# Altium PCB TIDA-010954-RevB.PcbDoc (part 4 of 8)
Units mm, origin at the board's own origin, x right, y up, seen from the top; angles counter-clockwise.
Board outline 290 x 100 mm, 6 copper layers (Top Layer, Mid1, Mid2, Mid3, Mid4, Bottom Layer), stack 1.59 mm thick; 394 components, 204 nets, 1137 pads, 2188 vias.
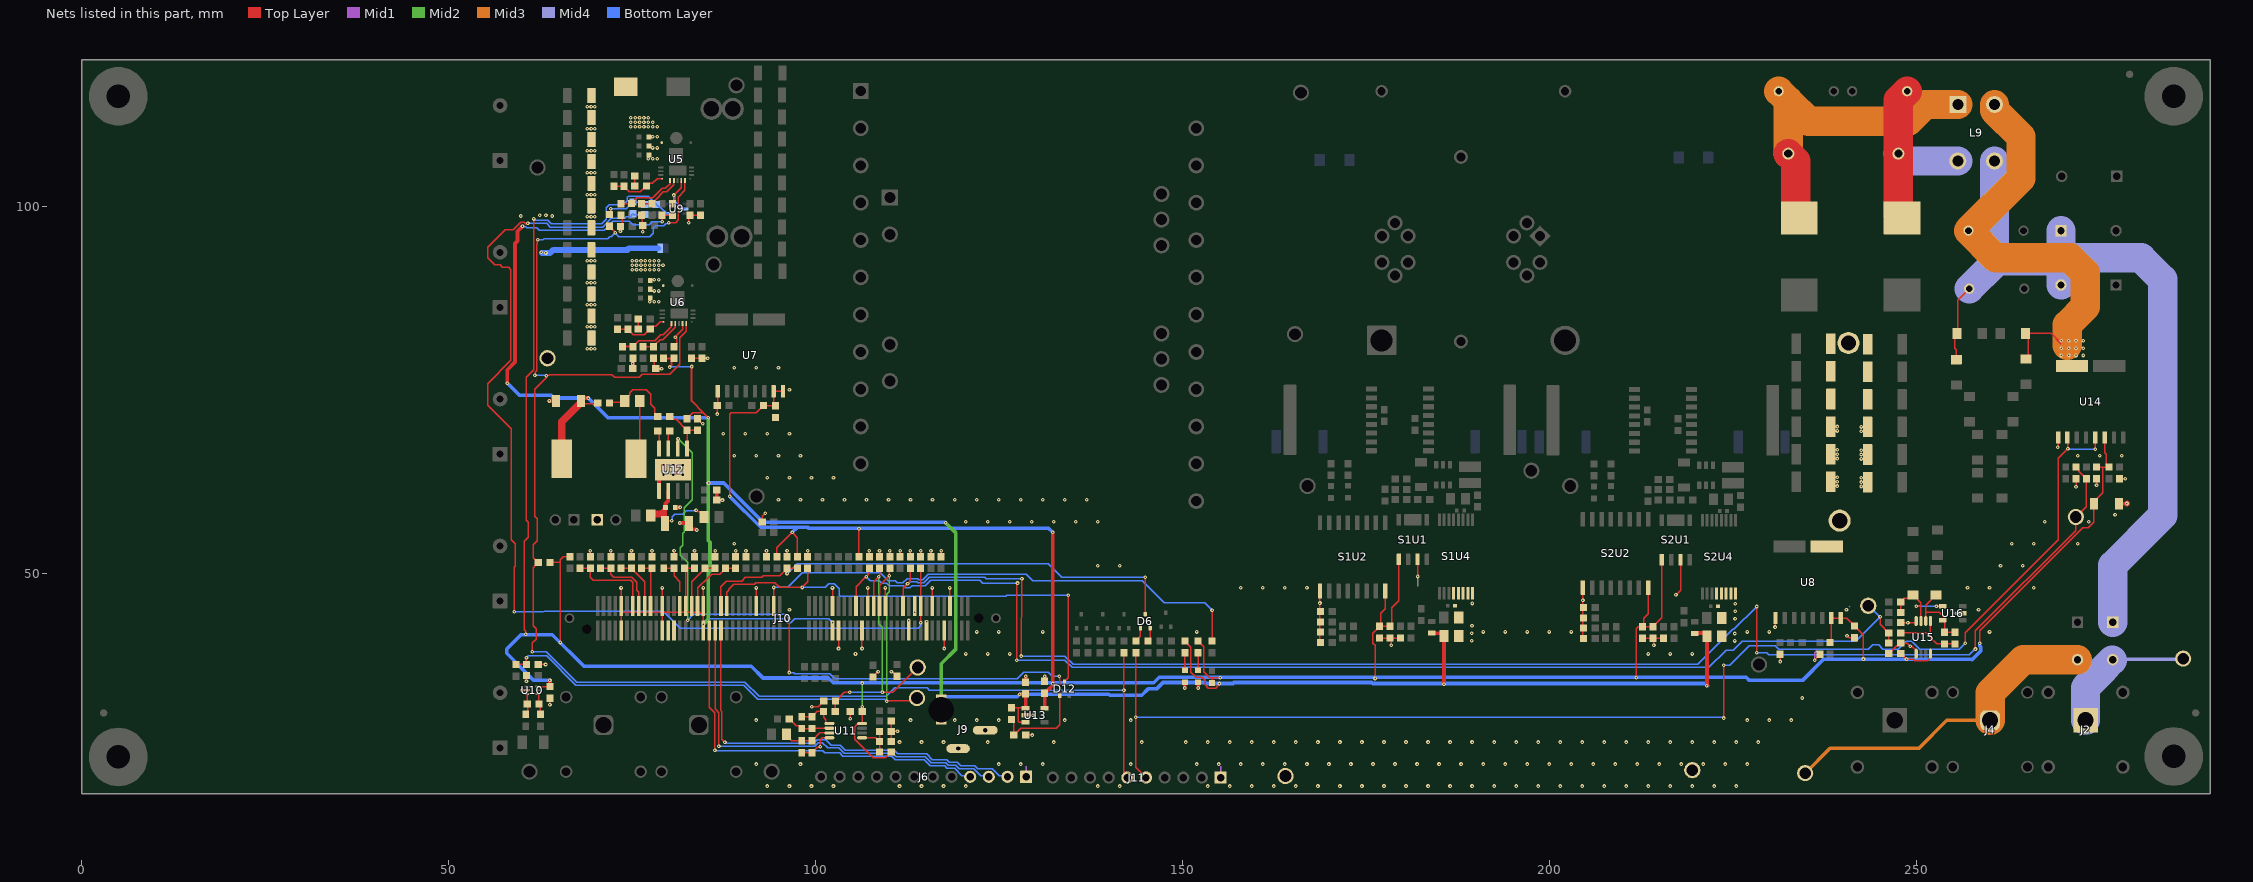
[diagram p7: the nets of this part, all layers, seen from the top]

## Part data (continued)
S1C12 S2C12: library part CMP-0009015-2, "CAP, CERM, 10 uF, 50 V, +/- 10%, X5R, AEC-Q200 Grade 1, 1206", Cap_Case=1206, Manufacturer=MuRata, Supplier Part Number 1=490-12456-1-ND, TempCo=X5R, Tolerance_%=10%, Value1=Unknown, Value2=50V, ValueDisplayed=10uF, AEC Category=Q200, AEC Grade=1, AEC Qualified=Y, Cap_F=10µF, ComponentLink1Description="Datasheet link", ComponentLink1URL=http://search.murata.co.jp/Ceramy/image/img/A01X/G101/ENG/GRT31CR61H106KE01-01.pdf, CompType=Capacitor, LatestRevisionDate=2017-03-09, MountType=SMT, PackageReference=1206, PartNumber=GRT31CR61H106KE01L, Polarized=N, Published=2008-06-19, Publisher="Texas Instruments", RoHS=Y, SizeArea_mm2=5.12, SizeAreaWB_mm2=10.92, SizeX_mm=3.2, SizeY_mm=1.6, SizeZ_mm=1.8, Supplier 1=Digi-Key, Supplier 2=Newark, Supplier 3=Mouser, Supplier Part Number 3=81-GRT31CR61H106KE1L, TaMax_C=85°C, TaMin_C=-55°C, Technology=Ceramic, U/M=EA, VDC_V=50V
S1C13 S2C13: library part CMP-0115362-1, "WCAP-CSGP Multilayer Ceramic Chip Capacitor, General Purpose, size 0402, X7R, 15nF, 25VDC", Capacitance Tolerance=+/-10%, Case/Size Code=0402, Insulation Resistance=10GOhm, Manufacturer="Wurth Elektronik", Operating Temperature Max=125°C, Operating Temperature Min=-55°C, Rated Voltage (DC)=25V, Cap_F=15nF, Category="Multilayer Ceramic Chip Capacitors", Ceramic Type=X7R, ComponentLink1Description="Website Link", ComponentLink1URL=https://www.we-online.com/redexpert/article/885012205051?ad, ComponentLink2Description="Datasheet Link", ComponentLink2URL=https://www.we-online.com/redexpert/spec/885012205051?ad, Design Item ID=885012205051, Dissipation Factor=3.5%, Height=0.5mm, Length=1mm, Manufacturer Part Number=885012205051, Match Code=WCAP-CSGP, Mount="Surface Mount", Packaging="Tape and Reel", PartNumber=885012205051, Source=Capacitors.SchLib, Technical Reference=X7R0402153K025DFCT10000, Width=0.5mm
S1D1 S2D1: library part CMP-0085046-1, "Diode, TVS, Bi, 440 V, 713 Vc, 400 W, 0.6 A, SMA (non-polarized)", Manufacturer=Littelfuse, Value1=713V, AEC Category=Q101, AEC Qualified=N, ComponentLink1Description="Datasheet link", ComponentLink1URL=https://www.littelfuse.com/~/media/electronics/datasheets/tvs_diodes/littelfuse_tvs_diode_smaj_datasheet.pdf.pdf, CompType=TVS, Ipp=600mA, MountType=SMT, PackageReference="SMA (non-polarized)", PartNumber=SMAJ440CA, Ppk=400W, RJA_CperW=120, RoHS=Y, SizeArea_mm2=13.068125, SizeAreaWB_mm2=32.368125, SizeX_mm=5.075, SizeY_mm=2.575, SizeZ_mm=2.65, Vbr_Max=543V, Vbr_Min=492V, Vc=713V, VRWM=440V
S1L1 S2L1: library part CMP-0057419-2, "Inductor, Drum Core, Ferrite, 15 uH, 0.65 A, 0.4 ohm, SMD", Manufacturer=Bourns, Supplier Part Number 1=SDR0302-150MLCT-ND, Value1="0.4 ohm", Value2=0.65A, ValueDisplayed=15uH, AEC Category=Q200, AEC Qualified=?, ComponentLink1Description="Datasheet link", ComponentLink1URL=http://www.bourns.com/data/global/pdfs/SDR0302.pdf, CompType=Inductor, DCR_ohm=4d, Green_EU RoHS=Passed, Green_EU RoHS-2=Incomplete, Green_Lifecycle=Active, Green_REACh=Passed, Imax_A=6.5dA, Ind_H=15µH, Irms="0.65A @ 40C rise", Isat="0.86A @ 10% inductance drop", LatestRevisionDate=2017-06-02, Material=Ferrite, MountType=SMT, PackageReference=3x2.5x2.8mm, PartNumber=SDR0302-150ML, Published=2008-06-26, Publisher="Texas Instruments", RoHS=Y, SizeArea_mm2=8.4, SizeAreaWB_mm2=15.2, SizeX_mm=3, SizeY_mm=2.8, SizeZ_mm=2.5, Supplier 1=Digi-Key, Supplier 2=Mouser, Supplier 3=Farnell, Supplier Part Number 2=652-SDR0302-150ML, Supplier Part Number 3=1682358, Technology="Drum Core"
S1L2 S2L2: library part CMP-0100992-1, "WE-PMI SMT Power Multilayer Inductor, size 0603, 2.2uH, 0.8A, 375mOhm", Case/Size Code=0603, DC Resistance=375mOhm, Inductance=2.2uH, Inductance Tolerance=20%, Manufacturer="Wurth Elektronik", Operating Temperature Max=125°C, Operating Temperature Min=-40°C, Rated Current=0.8A, Saturation Current=0.28A, Self Resonant Frequency=80MHz, Category="Power Inductors", Component Type=Standard, ComponentLink1Description="Website Link", ComponentLink1URL=https://www.we-online.com/redexpert/article/74479763222?ad, ComponentLink2Description="Datasheet Link", ComponentLink2URL=https://www.we-online.com/redexpert/spec/74479763222?ad, Design Item ID=74479763222, Height=0.8mm, Length=1.6mm, Manufacturer Part Number=74479763222, Match Code=WE-PMI, Mount="Surface Mount", Packaging="Tape and Reel", PartNumber=74479763222, Pin Count=2, Q Factor=15, Source=Inductors.SchLib, Type="Low RDC", Width=0.8mm
S1R2 S1R3 S2R2 S2R3: library part CMP-0122927-1, "Thermal Pad 6.40mm x 3.20mm Rectangular", Digikey Part Number=764-THJP2512AST1CT-ND, Manufacturer=Vishay, Mouser Part Number=71-THJP2512AST1, Operating Temperature Range="-65°C to +150°C", AEC Grade="Grade 0", AEC Qualified=Yes, ComponentLink1Description=Datasheet, ComponentLink1URL=https://www.vishay.com/docs/60157/thjp.pdf, datasheet=https://www.vishay.com/docs/60157/thjp.pdf, Datasheet Path=datasheets/Res-THJP2512AST1.pdf, Digikey Description="THERMAL JUMPER 2512 30 MIL LEAD-", helpURL=https://upverter.com/upn/revision/ceaa2e8b1f06c0a2/, Lead Free=Yes, Mouser Description="THERMAL JUMPER 2512 30 MIL LEAD, wraparound Sn (e3) solder", PackageReference=2512, Part Number=THJP2512AST1, PartNumber=THJP2512AST1, RoHS=TRUE, SizeZ_mm=0.035inch, Supplier 1=Digikey, Supplier 2=Mouser, Supplier Part Number 1=764-THJP2512AST1CT-ND, Supplier Part Number 2=71-THJP2512AST1
S1R9 S2R9: library part CMP-0022961-4, "RES, 270 k, 1%, 0.1 W, 0603", Manufacturer=Yageo, Power_W=100mW, Supplier Part Number 1=311-270KHRCT-ND, TempCo="100 ppm/C", Tolerance_%=1%, Value2=0.1W, Value_Code=270k, AEC Category=Q200, AEC Grade=N/A, AEC Qualified=N, ComponentLink1Description="Datasheet link", ComponentLink1URL=http://www.yageo.com/pdf/Pu-RC0603_51_PbFree_L_2.pdf, CompType=Resistor, MountType=SMT, PackageReference=0603, PartNumber=RC0603FR-07270KL, Res_ohm=270k, RoHS=Y, SizeArea_mm2=1.28, SizeAreaWB_mm2=4.68, SizeX_mm=1.6, SizeY_mm=0.8, SizeZ_mm=1, Supplier 1=Digi-Key, Supplier 2=Mouser, Supplier 3=Farnell, Supplier Part Number 2=603-RC0603FR-07270KL, Supplier Part Number 3=9238778, Technology="Thick Film", Value1=1%, ValueDisplayed=270k, VDC_V=75V
S1R11 S2R11: library part CMP-0022852-5, "RES, 18.0 k, 1%, 0.1 W, 0603", Manufacturer=Yageo, Power_W=100mW, Supplier Part Number 1=311-18.0KHRCT-ND, TempCo="100 ppm/C", Tolerance_%=1%, Value2=0.1W, Value_Code=18k0, ValueDisplayed=18.0k, AEC Category=Q200, AEC Grade=N/A, AEC Qualified=N, ComponentLink1Description="Datasheet link", ComponentLink1URL=http://www.yageo.com/pdf/Pu-RC0603_51_PbFree_L_2.pdf, CompType=Resistor, MountType=SMT, PackageReference=0603, PartNumber=RC0603FR-0718KL, Res_ohm=18k, RoHS=Y, SizeArea_mm2=1.28, SizeAreaWB_mm2=4.68, SizeX_mm=1.6, SizeY_mm=0.8, SizeZ_mm=1, Supplier 1=Digi-Key, Supplier 2=Mouser, Supplier 3=Farnell, Supplier Part Number 2=603-RC0603FR-0718KL, Supplier Part Number 3=9238638, Technology="Thick Film", Value1=1%, VDC_V=75V
S1R12 S2R12: library part CMP-0023273-4, "RES, 787 k, 1%, 0.1 W, 0603", Manufacturer=Yageo, Power_W=100mW, Supplier Part Number 1=311-787KHRCT-ND, TempCo="100 ppm/C", Tolerance_%=1%, Value2=0.1W, Value_Code=787k, AEC Category=Q200, AEC Grade=N/A, AEC Qualified=N, ComponentLink1Description="Datasheet link", ComponentLink1URL=http://www.yageo.com/pdf/Pu-RC0603_51_PbFree_L_2.pdf, CompType=Resistor, EIA_Code=E96, MountType=SMT, PackageReference=0603, PartNumber=RC0603FR-07787KL, Res_ohm=787k, RoHS=Y, SizeArea_mm2=1.28, SizeAreaWB_mm2=4.68, SizeX_mm=1.6, SizeY_mm=0.8, SizeZ_mm=1, Supplier 1=Digi-Key, Supplier 2=Mouser, Supplier Part Number 2=603-RC0603FR-07787KL, Technology="Thick Film", Value1=1%, ValueDisplayed=787k, VDC_V=75V
S1R14 S2R14: library part CMP-0023259-5, "RES, 71.5 k, 1%, 0.1 W, 0603", Manufacturer=Yageo, Power_W=100mW, Supplier Part Number 1=311-71.5KHRCT-ND, TempCo="100 ppm/C", Tolerance_%=1%, Value2=0.1W, Value_Code=71k5, ValueDisplayed=71.5k, AEC Category=Q200, AEC Grade=N/A, AEC Qualified=N, ComponentLink1Description="Datasheet link", ComponentLink1URL=http://www.yageo.com/pdf/Pu-RC0603_51_PbFree_L_2.pdf, CompType=Resistor, EIA_Code=E96, MountType=SMT, PackageReference=0603, PartNumber=RC0603FR-0771K5L, Res_ohm=71.5k, RoHS=Y, SizeArea_mm2=1.28, SizeAreaWB_mm2=4.68, SizeX_mm=1.6, SizeY_mm=0.8, SizeZ_mm=1, Supplier 1=Digi-Key, Supplier 2=Mouser, Supplier Part Number 2=603-RC0603FR-0771K5L, Technology="Thick Film", Value1=1%, VDC_V=75V
S1TP1 S2TP1 TP4 TP5 TP6 TP7 TP8 TP9 TP10 TP11 TP12 TP13 TP14 TP15 TP16 TP18 TP25 TP26 TP27: library part CMP-0055148-2, "Test Point, Multipurpose, Black, TH", Color=Black, Manufacturer="Keystone Electronics", Supplier Part Number 1=36-5011-ND, CNHeader=FALSE, ComponentLink1Description="Datasheet URL", ComponentLink1URL=http://www.keyelco.com/userAssets/file/M60-2p60.pdf, CompType="Test Point", ContactFinish=Silver, CT=TRUE, Green_EU RoHS=Passed, Green_EU RoHS-2=Incomplete, Green_Lifecycle=Active, Green_REACh=Passed, LatestRevisionDate=26/05/2017, MountType=TH, PackageReference="Black Multipurpose Testpoint", PartNumber=5011, Publisher="Texas Instruments", RoHS=Y, Supplier 1=Digi-Key, Supplier 2=Mouser, Supplier Part Number 2=534-5011
S1U1 S2U1: library part CMP-0122473-1, "Automotive ±1.5°C, 3-kVRMS Isolated Temperature Sensor With Analog Output With < 2 Seconds Response Time and 500VRMS Working Voltage", Manufacturer="Texas Instruments", Max Supply Voltage=5.5V, Min Supply Voltage=2.3V, Operating Supply Current=10uA, Operating Temperature Range="-40°C to +150°C", AEC Grade="Grade 0", AEC Qualified=Yes, Datasheet Path=datasheets/IC-ISOTMP35BEDFQRQ1.pdf, helpURL=https://upverter.com/upn/revision/9d6633f19cb3a875/, PackageReference=SOIC7, Part Number=ISOTMP35BEDFQRQ1, PartNumber=ISOTMP35BEDFQRQ1, RoHS=UNKNOWN, Sensor Output="Analog Voltage", SizeZ_mm=1.75mm, Standoff Height=0.11mm, TaMax_C=+150°C, TaMin_C=-40°C, TJmax_C=+155°C
S1U2 S2U2: library part CMP-0096105-1, "General purpose, 50-Mbps, six-channel (4/2) digital isolator 16-SOIC -40 to 125", Digikey Part Number=296-ISO6762DWRCT-ND, Manufacturer="Texas Instruments", Max Supply Voltage=5.5V, Min Supply Voltage=1.71V, Mouser Part Number=595-ISO6762DWR, Operating Temperature Range="-40°C to +125°C", AEC Qualified=No, ComponentLink1Description=Datasheet, ComponentLink1URL=https://www.ti.com/lit/ds/symlink/iso6762.pdf, datasheet=https://www.ti.com/lit/ds/symlink/iso6762.pdf, Datasheet Path=datasheets/IC-ISO6762DWR.pdf, Digikey Description="GENERAL PURPOSE, 50-MBPS, SIX-CH", helpURL=https://upverter.com/upn/revision/21f4622b36668d4f/, Interface=SPI,UART,CAN,RS-232,RS-485, Lead Free=Yes, PackageReference=SOIC16, Part Number=ISO6762DWR, PartNumber=ISO6762DWR, RoHS=TRUE, SizeZ_mm=2.65mm, Standoff Height=0.1mm, TaMax_C=+125°C, TaMin_C=-40°C, TJmax_C=+150°C
S1U3 S2U3: library part CMP-0013231-2, "28-V Output Voltage Boost Converter with Power Diode and Isolation Switch, DBV0006A (SOT-6)", Alternate Manufacturer="Texas Instruments", Alternate PartNumber=TLV61046ADBVT, ComponentLink1Description="Datasheet Link", ComponentLink1URL="https://sps06.itg.ti.com/sites/KMS/crossdivteams/altium/docs/ComponentDatasheets/TLV61046A 2017-2-3.pdf", CompType=IC, LatestRevisionDate=2017-03-09, Manufacturer="Texas Instruments", MountType=SMT, PackageDescription=SOT-6, PackageReference=DBV0006A, PartNumber=TLV61046ADBVR, Publisher="Texas Instruments", SizeArea_mm2=8.12, SizeAreaWB_mm2=14.82, SizeX_mm=2.8, SizeY_mm=2.9, SizeZ_mm=1.45, U/M=EA
S1U4 S2U4: library part CMP-0120108-2, "1.5W, High-Density, >5 kVRMS Isolated DC-DC Converter", Manufacturer="Texas Instruments", Max Supply Voltage=5.5V, Min Supply Voltage=4.5V, Operating Temperature Range="-40°C to +125°C", Output Voltage=5/5.5V, AEC Category=Q200, AEC Qualified=No, ComponentLink1Description="Datasheet Link", ComponentLink1URL=http://www.ti.com/lit/ds/symlink/GPN.pdf, ComponentLink2Description="Product Folder", ComponentLink2URL=http://www.ti.com/product/GPN, ComponentLink3Description="Online Datasheet", ComponentLink3URL=http://www.ti.com/product/GPN/datasheet, CompType=IC, Datasheet Path=datasheets/IC-UCC33421-Q1.pdf, helpURL=https://upverter.com/upn/revision/b421b141291ae359/, Number Of Outputs=1, Output Type=AdjustableProgrammable, PackageReference=SSOP16, Part Number=UCC33421-Q1, PartNumber=UCC33421-Q1, RoHS=UNKNOWN, SizeZ_mm=2.6mm, Standoff Height=0.14mm
T1: library part CMP-0123122-1, "Transformer", Manufacturer=Bourns, Operating Temperature Range="-40°C to +125°C", Voltage_Isolation_Vrms=3kV, AEC Qualified=No, Datasheet Path=datasheets/Trans-B181134V1.pdf, DCR_ohm=1.14m, helpURL=https://upverter.com/upn/revision/e674d582bcaf96ef/, Ind_H=7.6µH, Lead Free=Yes, Ns1toNp=1:3.5, PackageReference=PTH_XFRMR_48MM0_50MM0, Part Number=B181134V1, PartNumber=B181134V1, RoHS=TRUE, Rsec1_ohm=14m, SizeZ_mm=32mm
T2: library part CMP-0122999-1, "TRANSFORMER", Manufacturer="Wurth Electronics", Operating Temperature Range="-40°C to +125°C", Voltage_Isolation_Vrms=3.5kV, AEC Qualified=No, Datasheet Path=datasheets/Trans-750371975r00.pdf, DCR_ohm=4m, helpURL=https://upverter.com/upn/revision/2682f03042b07002/, Ind_H=10µH, Lead Free=Yes, Ns1toNp=1:3.5, PackageReference=PTH_XFRMR_62MM7_62MM8, Part Number=750371975r00, PartNumber=750371975r00, RoHS=TRUE, Rsec1_ohm=47m, SizeZ_mm=46.3mm
TP2: library part CMP-0055147-2, "Test Point, Multipurpose, Red, TH", Color=Red, Manufacturer="Keystone Electronics", Supplier Part Number 1=36-5010-ND, CNHeader=FALSE, ComponentLink1Description="Datasheet URL", ComponentLink1URL=http://www.keyelco.com/userAssets/file/M60-2p60.pdf, CompType="Test Point", ContactFinish=Silver, CT=TRUE, Green_EU RoHS=Passed, Green_EU RoHS-2=Incomplete, Green_Lifecycle=Active, Green_REACh=Passed, LatestRevisionDate=26/05/2017, MountType=TH, PackageReference="Red Multipurpose Testpoint", PartNumber=5010, Publisher="Texas Instruments", RoHS=Y, Supplier 1=Digi-Key, Supplier 2=Mouser, Supplier Part Number 2=534-5010
TP3: library part CMP-0055156-2, "Test Point, Multipurpose, Blue, TH", Color=Blue, Manufacturer="Keystone Electronics", Supplier Part Number 1=36-5127-ND, CNHeader=FALSE, ComponentLink1Description="Datasheet URL", ComponentLink1URL=http://www.keyelco.com/userAssets/file/M60-2p60.pdf, CompType="Test Point", ContactFinish=Silver, CT=TRUE, Green_EU RoHS=Passed, Green_EU RoHS-2=Incomplete, Green_Lifecycle=Active, Green_REACh=Passed, LatestRevisionDate=26/05/2017, MountType=TH, PackageReference="Blue Multipurpose Testpoint", PartNumber=5127, Publisher="Texas Instruments", RoHS=Y, Supplier 1=Digi-Key, Supplier 2=Newark, Supplier 3=Mouser, Supplier Part Number 2=95M2499, Supplier Part Number 3=534-5127
U5 U6: library part CMP-0122483-1, "170-V GaN Half-Bridge Power Stages", Manufacturer="Texas Instruments", Max Supply Voltage=5.5V, Min Supply Voltage=4.5V, Nominal Supply Current=8.5mA, Operating Temperature Range="-40°C to +150°C", Part Number=LMG2175, AEC Qualified=No, Datasheet Path=datasheets/IC-LMG2175.pdf, helpURL=https://upverter.com/upn/revision/effccdb2183bc5a0/, Number Of Outputs=1, PackageReference=VQFN-FCRLF18, PartNumber=XLMG2100R026VBNR, RoHS=UNKNOWN, SizeZ_mm=0.85mm, Standoff Height=0mm, TJmax_C=+150°C
U7: library part CMP-0097984-1, Manufacturer="Texas Instruments", Operating Temperature Range=to, Datasheet Path=datasheets/IC-TMCS1133B1QDVGR.pdf, helpURL=https://upverter.com/upn/revision/f7e4ed2791c57507/, PackageReference=SOIC10, Part Number=TMCS1133B1QDVGR, PartNumber=TMCS1133B1QDVGR, RoHS=UNKNOWN, SizeZ_mm=2.65mm, Standoff Height=0.1mm
U8: library part CMP-0097986-1, Manufacturer="Texas Instruments", Operating Temperature Range=to, Datasheet Path=datasheets/IC-TMCS1133B3QDVGR.pdf, helpURL=https://upverter.com/upn/revision/3a7ff79afd910b2c/, PackageReference=SOIC10, Part Number=TMCS1133B3QDVGR, PartNumber=TMCS1133B3QDVGR, RoHS=UNKNOWN, SizeZ_mm=2.65mm, Standoff Height=0.1mm
U9: library part CMP-0013250-3, "TMP235DCK, DCK0005A (SOT-5)", Manufacturer="Texas Instruments", PartNumber=TMP235A2DCKR, AEC Category=Q200, AEC Qualified=N, ComponentLink1Description="Datasheet Link", ComponentLink1URL="https://sps06.itg.ti.com/sites/KMS/crossdivteams/altium/docs/ComponentDatasheets/TMP235 Initial data sheet MCP9700.pdf", ComponentLink2Description="Product Folder", ComponentLink2URL=http://www.ti.com/product/GPN, ComponentLink3Description="Online Datasheet", ComponentLink3URL=http://www.ti.com/product/GPN/datasheet, CompType=IC, MountType=SMT, PackageDescription=SOT-SC70-5, PackageReference=DCK0005A, SizeArea_mm2=4.2, SizeAreaWB_mm2=9.3, SizeX_mm=2.1, SizeY_mm=2.0, SizeZ_mm=1.1
U10: library part CMP-0085240-1, "Bidirectional, Precision Low- and High-Side Voltage Output, Current-Sense Amplifier, DRL0006A (SOT-5X3-6)", Alternate Manufacturer="Texas Instruments", Alternate PartNumber=INA185A3IDRLT, AEC Category=Q200, AEC Qualified=N, ComponentLink1Description="Datasheet Link", ComponentLink1URL=http://www.ti.com/lit/ds/symlink/ina185.pdf, ComponentLink2Description="Product Folder", ComponentLink2URL=http://www.ti.com/product/ina185, ComponentLink3Description="Online Datasheet", ComponentLink3URL=http://www.ti.com/product/ina185/datasheet, CompType=IC, Manufacturer="Texas Instruments", MountType=SMT, PackageDescription=SOT-5X3-6, PackageReference=DRL0006A, PartNumber=INA185A3IDRLR, SizeArea_mm2=2.56, SizeAreaWB_mm2=6.76, SizeX_mm=1.6, SizeY_mm=1.6, SizeZ_mm=0.6
U11: library part CMP-0073533-3, Alternate Manufacturer="Texas Instruments", Alternate PartNumber=TLV2333IDGKT, AEC Category=Q200, AEC Qualified=N, Code_JEDEC=MO-187-AA, ComponentLink1Description="Datasheet Link", ComponentLink1URL=http://www.ti.com/lit/ds/symlink/tlv2333.pdf, ComponentLink2Description="Product Folder", ComponentLink2URL=http://www.ti.com/product/tlv2333, ComponentLink3Description="Online Datasheet", ComponentLink3URL=http://www.ti.com/product/tlv2333/datasheet, CompType=IC, Manufacturer="Texas Instruments", MountType=SMT, PackageDescription=VSSOP-8, PackageReference=DGK0008A, PartNumber=TLV9002IDGKR, RoHS=Y, SizeArea_mm2=14.7, SizeAreaWB_mm2=23.6, SizeX_mm=4.9, SizeY_mm=3, SizeZ_mm=1.1
U12: library part CMP-0089262-2, Digikey Part Number=296-LM5164DDARCT-ND, Manufacturer="Texas Instruments", Max Supply Voltage=100V, Min Supply Voltage=6V, Mouser Part Number=595-LM5164DDAR, Nominal Supply Current=600uA, Operating Temperature Range="-40°C to +150°C", Output Voltage=1.2-90V, Switching Frequency=1MHz, AEC Category=Q200, AEC Qualified=No, ComponentLink1Description=Datasheet, ComponentLink1URL=http://www.ti.com/lit/ds/symlink/lm5164.pdf, ComponentLink2Description="Product Folder", ComponentLink2URL=http://www.ti.com/product/GPN, ComponentLink3Description="Online Datasheet", ComponentLink3URL=http://www.ti.com/product/GPN/datasheet, CompType=IC, datasheet=http://www.ti.com/lit/ds/symlink/lm5164.pdf, Datasheet Path=datasheets/IC-LM5164DDAR.pdf, Device Class L1="Integrated Circuits (ICs)", Device Class L2="Power Management ICs", Device Class L3="Voltage Regulators - Switching", Digikey Description="POWER MANAGEMENT", helpURL=https://upverter.com/upn/revision/f50a14a06c929ee3/, Lead Free=Yes, Max Duty Cycle=99%, Mouser Description="6-V to 100-V input, 1-A synchronous buck DC-DC converter with ultra-low IQ 8-SO PowerPAD -40 to 150", Number Of Outputs=1, Output Type=AdjustableProgrammable, PackageReference=SOPowerPAD8, Part Number=LM5164DDAR, PartNumber=LM5164DDAR, RoHS=TRUE, Standoff Height=0mm, Switching Topology=Buck, TJmax_C=+150°C
U13: library part CMP-0033468-1, "300-mA, Small-Size, High-PSRR LDO", Dropout Voltage=200mV, Manufacturer="Texas Instruments", Max Supply Voltage=5.5V, Min Supply Voltage=3.8V, Nominal Supply Current=80uA, Operating Temperature Range="-40°C to +85°C", Output Voltage=3.3V, Accuracy Percentage=1%, AEC Qualified=No, Datasheet Path=datasheets/IC-TLV77333PDBVR.pdf, helpURL=https://upverter.com/upn/revision/a8015f0933e53857/, Lead Free=Yes, Number Of Outputs=1, Output Type=Fixed, PackageReference=SOT23-5, Part Number=TLV77333PDBVR, PartNumber=TLV77333PDBVR, RoHS=UNKNOWN, SizeZ_mm=1.45mm, Standoff Height=0mm, TJmax_C=+85°C
U14: library part CMP-0096055-1, Manufacturer="Texas Instruments", Operating Temperature Range=to, Datasheet Path=datasheets/IC-TMCS1123B5QDVGR.pdf, helpURL=https://upverter.com/upn/revision/3eedce7f3e37160e/, PackageReference=SOICW10, Part Number=TMCS1123B5QDVGR, PartNumber=TMCS1123B5QDVGR, RoHS=UNKNOWN, SizeZ_mm=2.65mm, Standoff Height=0.1mm
U15: library part CMP-0073533-3, "350 kHz, Low-Noise, RRIO, CMOS Operational Amplifier for Cost-Sensitive Systems, DGK0008A (VSSOP-8)", Alternate Manufacturer="Texas Instruments", Alternate PartNumber=TLV2333IDGKT, AEC Category=Q200, AEC Qualified=N, Code_JEDEC=MO-187-AA, ComponentLink1Description="Datasheet Link", ComponentLink1URL=http://www.ti.com/lit/ds/symlink/tlv2333.pdf, ComponentLink2Description="Product Folder", ComponentLink2URL=http://www.ti.com/product/tlv2333, ComponentLink3Description="Online Datasheet", ComponentLink3URL=http://www.ti.com/product/tlv2333/datasheet, CompType=IC, Manufacturer="Texas Instruments", MountType=SMT, PackageDescription=VSSOP-8, PackageReference=DGK0008A, PartNumber=TLV9002IDGKR, RoHS=Y, SizeArea_mm2=14.7, SizeAreaWB_mm2=23.6, SizeX_mm=4.9, SizeY_mm=3, SizeZ_mm=1.1
U16: library part CMP-0085634-1, "3.6V Data-Line Surge and 30kV ESD Protection Diode Array, DBV0005A (SOT-23-5)", Alternate Manufacturer="Texas Instruments", Operating Temperature Range="-40 to 125 C", Rating=Catalog, AEC Category=Q200, AEC Qualified=N, ComponentLink1Description="Datasheet Link", ComponentLink1URL=http://www.ti.com/lit/ds/symlink/esds312.pdf, ComponentLink2Description="Product Folder", ComponentLink2URL=http://www.ti.com/product/esds312, ComponentLink3Description="Online Datasheet", ComponentLink3URL=http://www.ti.com/product/esds312/datasheet, CompType=IC, Manufacturer="Texas Instruments", MountType=SMT, PackageDescription=SOT-23-5, PackageReference=DBV0005A, PartNumber=ESDS312DBVR, RoHS=Y, SizeArea_mm2=8.12, SizeAreaWB_mm2=14.82, SizeX_mm=2.8, SizeY_mm=2.9, SizeZ_mm=1.45
ZZ1: library part CMP-0003616-3, ClassName=AssemblyNote, CompType=AssemblyNote, Key=AssemblyNoteLabel, LatestRevisionDate=2017-03-09, Publisher="Texas Instruments"
ZZ2: library part CMP-0077236-1, ClassName=AssemblyNote, CompType=AssemblyNote, Key=AssemblyNote, LatestRevisionDate=2017-08-10, Publisher="Texas Instruments"
ZZ3: library part CMP-0077237-1, ClassName=AssemblyNote, CompType=AssemblyNote, Key=AssemblyNote, LatestRevisionDate=2017-08-10, Publisher="Texas Instruments"
ZZ4: library part CMP-0077238-1, ClassName=AssemblyNote, CompType=AssemblyNote, Key=AssemblyNote, LatestRevisionDate=2017-08-10, Publisher="Texas Instruments"

## Free pads (board coordinates)
  round 3 hole 2.1: 1(85.8,113.3) 1(86.6,95.9) 1(88.7,113.3) 1(89.9,95.9) 1(239.5,57.2) 1(240.7,81.4)

## Via types
v1: diameter 0.5, hole 0.2, Top Layer to Bottom Layer, tented both sides, 1333 vias
v2: diameter 0.5/0.5/0.5/0.5/0.5/0.5 (per signal layer), hole 0.2, Top Layer to Bottom Layer, tented both sides, 847 vias
v3: diameter 0.63, hole 0.33, Top Layer to Bottom Layer, tented both sides, 6 vias
v4: diameter 0.5, hole 0.2, Top Layer to Bottom Layer, 1 vias
v5: diameter 0.5/0.5/0.5/0.5/0.5/0.5 (per signal layer), hole 0.2, Top Layer to Bottom Layer, 1 vias

## Nets (pads, with @x,y where several pads share a name; then routed paths per layer and width w, separated by ;. In a path a pad name is that pad's centre, name@x,y a point inside that pad or via, vN(x,y) a via of type N, cw(c..) or ccw(c..) an arc to the next point about the centre after c; other vN are vias at no path point)
3V3: C19.1 C22.1 C27.1 C28.1 C31.2 C46.1 C69.2 C73.2 C103.1 D10.2 R25.1 R39.1 R41.1 R53.1 R62.2 R65.2 R68.2 R73.1 R94.1 R103.1 S1C2.1 S1C86.1 S1U1.1 S1U2.16 S2C2.1 S2C86.1 S2U1.1 S2U2.16 U7.9 U7.10 U8.9 U8.10 U9.4 U10.6 U11.8 U13.5 U14.8 U15.8 | length 540.5
  Top Layer w0.2: v1(60.5,41.7) 60.5,42.1 60.3,42.3 60.3,54.397 60.863,54.96 60.863,56.952 60.55,57.266 60.55,76.711 61.588,77.75 61.588,77.876 61.592,77.879 61.592,98.292 v1(61.6,98.3) ; U10.6@62.14,34.6 C28.1@63.6,34.6 ; R25.1@63.8,51.5 65.2,51.5 ; v1(65.2,40.6) 65.2,51.5 ; R94.1@66.5,52.3 65.6,52.3 65.2,51.9 65.2,51.5 ; v1(88.3,60.5) 88.3,71.675 88.525,71.9 91.921,71.9 92.875,72.854 R39.1@92.9,72.854 C19.1@94.545,72.854 94.275,73.124 U7.9@94.275,74.8 ; U7.9@94.325,74.825 U7.10@95.545,74.825 ; R68.2@94.7,52.3 94.7,53.5 v1(96.8,55.6) 97.5,54.9 R65.2@97.5,52.3 ; R73.1@105.9,52.3 v1(105.9,56.1) ; v1(106.325,31.85) C31.2@106.325,31.2 U11.8@106.325,29.575 105.807,29.575 105.682,29.45 105.658,29.45 105.35,29.142 105.35,28.922 105.35,27.408 107.833,24.925 109.5,24.925 110.275,25.7 R53.1@110.3,25.7 ; R62.2@152.1,40.8 152.1,40.775 152.875,40 152.875,36.6 153.675,35.8 154,35.8 ; D10.2@154,35.075 154,35.8 ; v1(155.1,35.8) 154,35.8 ; v1(176.2,35.7) 176.2,40.195 175.917,40.478 175.917,41.867 176.826,42.776 S1C86.1@176.826,42.801 ; S1C86.1@176.939,42.689 177.026,42.776 S1C86.1@177.026,42.801 ; S1U2.16@177.59,47.518 177.59,45.19 177,44.6 177,42.801 S1C86.1@177.026,42.801 ; S1C2.1@178.371,42.801 S1C86.1@177.026,42.801 ; S1C2.1@178.4,42.9 178.5,43 178.5,45.3 179.454,46.254 S1U1.1@179.454,51.918 ; v1(211.8,35.8) 211.783,35.817 211.783,42.483 212.056,42.756 S2C86.1@212.854,42.756 ; S2C86.1@212.8,42.8 212.8,43.9 213.418,44.518 S2U2.16@213.418,48.172 ; S2C86.1@212.944,42.756 S2C2.1@214.079,42.756 214.079,42.781 215.281,43.983 S2U1.1@215.281,51.872 ; R41.1@238.2,40.7 238.375,40.875 U8.9@238.375,43.925 U8.10@239.645,43.925 240.5,43.925 241.55,42.875 C22.1@241.55,42.85 241.55,42.825 242.743,41.632 v1(242.743,38.343) ; C69.2@247.8,39.1 247.825,39.1 v1(248.612,38.312) 249.495,38.312 249.708,38.1 251.442,38.1 251.75,38.408 251.75,38.432 251.875,38.557 U15.8@251.875,39.075 ; v1(258.6,40.5) 258.6,42.203 272.603,56.206 273.37,56.206 274.13,56.965 C73.2@274.13,59.5 274.13,59.75 275.35,60.97 275.35,64.5 ; C46.1@274.5,64.5 275.35,64.5 ; U14.8@275.605,68.525 275.605,66.46 275.825,66.24 275.825,64.875 R103.1@276.2,64.5 275.35,64.5
  Top Layer w0.5: C28.1@63.8,34.6 v1(63.8,35.453) ; U13.5@131.2,31.65 C103.1@131.2,33.7 ; C103.1@131.2,33.725 131.779,34.304 131.815,34.304 132.3,34.789 v1(132.3,35) v1(132.3,55.6)
  Mid2 w0.2: v1(106.325,31.85) v1(106.325,35.075)
  Bottom Layer w0.2: v1(61.6,98.3) 61.681,98.3 61.881,98.1 63.507,98.1 63.943,97.664 67.737,97.664 67.751,97.65 70.887,97.65 71.471,98.234 71.471,99.849 71.872,100.25 73.775,100.25 74.325,100.8 74.325,101.224 74.501,101.4 77.173,101.4 78.275,100.298 C27.1@78.3,100.298 78.675,99.923 78.855,99.923 79.75,99.028 U9.4@79.975,99.028
  Bottom Layer w0.5: v1(63.8,35.453) 61.568,35.453 57.901,39.119 57.901,39.699 59.853,41.652 64.126,41.652 68.428,37.35 91.222,37.35 92.806,35.766 101.712,35.766 102.378,35.1 v1@106.3,35.1 ; v1(88.3,60.5) 92.5,56.3 99,56.3 ; v1(96.8,55.6) 97.379,56.179 ; 99,56.179 131.721,56.179 v1(132.3,55.6) ; v1@106.325,35.1 146.05,35.1 146.8,35.85 226.792,35.85 227.208,35.434 234.434,35.434 237.3,38.3 v1@242.7,38.3 ; v1@242.743,38.3 257.5,38.3 ; 257.545,38.255 258.7,39.41 258.7,39.99 258.6,40.09 v1(258.6,40.5)
5V: C20.2 C29.2 C45.2 C102.1 C104.1 J9.1 J10.48 J10.84 J10.98 J10.112 L7.2 R16.1 R26.1 R56.2 R57.2 R63.2 S1C15.1 S1L2.2 S2C15.1 S2L2.2 U13.1 U13.3 | length 370.5
  Top Layer w0.2: C102.1@68.4,73.9 C102.1@68,73.5 68.4,73.1 C104.1@70.3,73.1 ; J10.112@73.5,41.7 73.5,44.5 73.7,44.7 79.1,44.7 ; R16.1@79.06,98.782 79.1,98.742 v1(79.1,97.9) ; J10.98@79.1,42.2 79.1,44.7 ; R16.1@79.16,98.782 C20.2@80.5,98.782 ; R56.2@82.475,71.1 82.475,71.125 83.25,71.9 84.707,71.9 ; J10.84@84.7,42 v1(84.7,43.1) 84.7,44.2 84.2,44.7 79.1,44.7 ; J10.48@102.3,42.2 v1(102.3,43.3) ; R57.2@126.725,31.675 127.65,31.675 ; U13.1@128.575,31.675 127.65,31.675 ; U13.3@128.6,29.75 127.722,29.75 127.605,29.867 127.605,31.63 127.65,31.675 ; R63.2@150.3,40.8 150.3,40.775 151.125,39.95 151.125,36.575 151.813,35.887 152.612,35.887 153.059,35.44 153.059,34.822 153.506,34.375 154.494,34.375 154.943,34.824 154.943,34.943 v1(155,35)
  Top Layer w0.25: R26.1@79.36,79.3 C29.2@80.7,79.3 80.35,78.95 80.35,78.35 v1(80.125,78.125) ; v1(83.1,78.194) 83.1,73.507 84.707,71.9 v1(85.383,71.223)
  Top Layer w0.5: v4(58,75.9) 58,77.768 59.038,78.806 59.038,94.97 59.379,95.31 59.379,96.607 v1(60.057,97.286) ; C102.1@68.4,73.9 v1(69,73.9) ; R57.2@126.7,31.7 R57.2@126.725,31.675 ; v1(127.8,33.55) 128.55,33.55 C45.2@128.6,33.6 U13.1@128.6,31.65 U13.1@128.575,31.675 ; S1L2.2@183.911,41.867 185.533,41.867 S1C15.1@185.7,41.7 ; S1C15.1@185.592,41.494 185.592,34.908 v1(185.6,34.9) ; S2L2.2@219.739,41.822 219.817,41.9 S2C15.1@221,41.9 ; v1(221.4,34.7) 221.42,34.72 S2C15.1@221.42,41.448
  Top Layer w1: L7.2@65.2,67.4 65.42,67.62 65.42,70.67 68,73.25 C102.1@68,73.5
  Mid2 w0.5: v1(84.7,43.1) 85.383,43.783 85.383,50.1 ; v1(85.383,71.223) v1@85.383,62.325 ; 85.4,50.1 85.6,50.3 85.6,54.247 85.383,54.463 v1@85.383,62.325 ; v1(85.4,62.325) v1@85.383,62.325 ; J9.1@117.1,31.8 117.1,37.7 119.1,39.7 119.1,55.5 v1(117.7,56.9)
  Bottom Layer w0.2: v1(60.057,97.286) 60.115,97.229 60.494,97.229 60.629,97.093 62.007,97.093 62.307,96.793 71.162,96.793 72.336,97.967 74.614,97.967 75.074,97.508 77.3,97.508 77.692,97.9 v1(79.1,97.9) ; v1(84.7,43.1) 84.781,43.1 85.483,43.801 95.671,43.801 96.172,43.3 96.628,43.3 97.129,43.801 101.799,43.801 v1(102.3,43.3)
  Bottom Layer w0.25: v1(80.125,78.125) 80.159,78.159 83.066,78.159 v1(83.1,78.194)
  Bottom Layer w0.5: v4(58,75.9) 59.6,74.3 63.89,74.3 64.29,73.9 v1(69,73.9) 71.7,71.2 v1@85.383,71.2 ; v1(85.4,62.325) 87.465,62.325 92.79,57 117.6,57 v1(117.7,56.9) ; J9.1@117.1,31.45 117.1,32.751 117.55,33.201 127.451,33.201 v1(127.8,33.55) 139.92,33.55 140.07,33.4 144.41,33.4 145.285,34.275 146.425,34.275 147.3,35.15 153.085,35.15 153.235,35 v1(155,35) 156.85,35 157,35.15 175.76,35.15 175.91,35 221.2,35 v1@221.5,34.7
5V_FLT: C118.1 D12.3 J10.75 | length 65.8
  Top Layer w0.2: J10.75@87.9,45.6 87.9,47.474 88.15,47.724 88.15,47.848 88.831,48.53 91.611,48.53 91.832,48.75 94.428,48.75 95.078,48.1 v1(98.166,48.1) 98.166,48.119 98.9,48.853 C118.1@98.9,50.7 ; C118.1@99,50.775 C118.1@99,51 ; D12.3@133.9,35.254 133.9,35.319 134.4,35.819 v1(134.4,47.05)
  Bottom Layer w0.2: v1(98.166,48.1) 101.332,48.1 101.806,48.574 102.511,48.574 103.195,47.89 103.195,47.017 103.312,46.9 125.9,46.9 126.05,47.05 v1(134.4,47.05)
5V_GOOD: D12.1 R57.1 R61.2 U12.6 | length 102.9
  Top Layer w0.2: U12.6@81.205,67.004 81.225,67.024 81.225,68.351 v1(81.245,68.371) ; v1(96.4,36.5) v1(96.4,43.85) ; R57.1@127.05,29.75 127,29.8 R61.2@127,28 127.025,28 127.925,28.9 132.766,28.9 133.25,29.384 D12.1@133.25,33.354 133.225,33.379 133.225,35.975 v1(133.2,36)
  Mid2 w0.2: v1@81.245,68.445 v1(81.245,68.371) 83.2,66.416 83.2,60.046 82.085,58.931 82.085,55.633 81.915,55.463 81.915,53.861 81.55,53.496 81.55,52.5 82.55,51.5 v1(82.55,43.65)
  Bottom Layer w0.2: v1(82.55,43.65) 83.314,44.414 95.836,44.414 v1(96.4,43.85) ; v1(96.4,36.5) 96.985,36.5 97.17,36.316 101.94,36.316 102.606,35.65 127.45,35.65 128.35,36.55 131.7,36.55 132.25,36 v1(133.2,36)
AC_CS: C97.1 C114.1 J10.23 R101.1 TP6.1 | length 203.3
  Top Layer w0.2: J10.23@111.9,46.7 111.9,47.979 v1(112.511,48.589) ; v1@112.51,48.59 112.9,48.98 C114.1@112.9,50.7 ; v1(128,38.75) 127.995,38.755 127.995,44.001 128.1,44.106 v1(128.1,49.3) ; v1(228.2,39.2) v1(228.2,45.5) ; v1(258,39.7) 258,42.169 271.678,55.847 TP6.1@271.678,57.7 273.1,59.122 R101.1@273.1,62.9 273.1,62.925 272.075,63.95 272.075,64.125 C97.1@271.7,64.5
  Bottom Layer w0.2: v1(112.511,48.589) 112.592,48.589 112.902,48.9 113.757,48.9 113.906,48.75 114.75,48.75 115.5,49.5 115.966,49.5 123.051,49.5 123.251,49.3 v1(128.1,49.3) ; v1(128,38.75) 133.963,38.75 135.113,37.6 219.5,37.6 220.183,37.6 224.955,42.372 225.072,42.372 v1(228.2,45.5) ; v1(228.2,39.2) 229.541,39.2 229.841,38.9 257.122,38.9 257.922,39.7 v1(258,39.7)
AC_CS_FLT: J11.5 R64.1 U14.4 U14.7 | length 180.1
  Top Layer w0.2: R64.1@143.625,39.2 143.625,23.575 144.9,22.3 J11.5@145.1,22.3 ; v1(223.7,30.3) v1(223.7,37.5) ; v1(256.6,40.5) 256.6,41.9 269.3,54.6 269.3,65.7 v1(270.6,67) 270.562,67.038 270.562,68.488 U14.4@270.525,68.525 ; v1(274.335,66.935) U14.7@274.335,68.525
  Bottom Layer w0.2: v1(143.6,30.4) 223.519,30.4 223.619,30.3 v1(223.7,30.3) ; v1(223.7,37.5) 224.523,37.5 227.173,40.15 230.75,40.15 231.2,39.7 243.4,39.7 244,40.3 244.8,40.3 245.4,39.7 247.5,39.7 248.6,40.8 249.3,40.8 250.4,39.7 255.8,39.7 v1(256.6,40.5) ; v1(270.6,67) 270.665,66.935 v1(274.335,66.935)
AC_VS: C113.1 C135.1 J10.39 R111.2 TP15.1 | length 165.4
  Top Layer w0.2: J10.39@105.5,45.6 105.5,48.2 106.85,49.55 v1(106.9,49.55) ; v1@106.875,49.575 107.3,50 C113.1@107.3,50.7 ; v1(127.4,38.2) 127.4,48.519 127.5,48.619 v1(127.5,48.7) ; v1(245,44.1) 245,43.075 246.2,41.875 246.2,41.6 C135.1@246.2,40.5
  Bottom Layer w0.2: v1(106.9,49.55) 107.45,49 108.678,49 108.989,48.688 109.668,48.688 110.007,48.35 111.945,48.35 112.255,48.039 112.839,48.039 113.15,48.35 114.916,48.35 115.666,49.1 117.75,49.1 122.384,49.1 122.784,48.7 v1(127.5,48.7) ; v1(127.4,38.2) 133.947,38.2 134.947,37.2 221.7,37.2 224.05,39.55 224.997,39.55 226.232,40.785 241.685,40.785 v1(245,44.1) 244.95,44.1 243.45,45.6 TP15.1@243.4,45.6
CS_FLT: C106.1 D6.3 J10.77 R65.1 | length 69.7
  Top Layer w0.2: J10.77@87.1,45.6 87.1,48.198 87.831,48.93 89.895,48.93 90.433,49.467 92.662,49.467 92.883,49.687 95.113,49.687 C106.1@96.1,50.675 ; v1(96.1,50) C106.1@96.1,50.675 ; R65.1@97.5,50.7 C106.1@96.1,50.7 C106.1@96.1,50.675 ; D6.3@144.85,44.6 144.9,44.65 v1(144.9,49.5)
  Bottom Layer w0.2: v1(96.1,50) 96.181,50 97.481,51.3 131.7,51.3 133.5,49.5 v1(144.9,49.5)
DAB_POWER: C25.2 C26.2 C33.2 C34.2 C35.2 C36.2 C37.2 C40.2 C41.2 C42.2 C43.2 C44.2 C70.2 C71.2 C72.2 C74.2 C76.2 C77.2 C78.2 C79.2 C88.2 C96.2 C99.2 C101.2 C127.2 C140.2 L3.2 U5.7 U6.7
  other v2: 68.9,80.6 69.4,80.6 69.9,80.6 68.9,83.6 69.4,83.6 69.9,83.6 68.9,86.6 69.4,86.6 69.9,86.6 77.4,87 78,87 78.6,87 78,88.487 78.6,88.487 68.9,89.6 69.4,89.6 69.9,89.6 78,90 78.6,90 75,91.4 75.6,91.4 76.2,91.4 76.8,91.4 77.4,91.4 78,91.4 78.6,91.4 75,92 75.6,92 76.2,92 76.8,92 77.4,92 78,92 78.6,92 79.2,92 68.9,92.6 69.4,92.6 69.9,92.6 75,92.6 75.6,92.6 76.2,92.6 76.8,92.6 77.4,92.6 78,92.6 78.6,92.6 68.9,98.6 69.4,98.6 69.9,98.6 68.9,101.6 69.4,101.6 69.9,101.6 68.9,104.6 69.4,104.6 69.9,104.6 77.2,106.482 77.8,106.482 78.4,106.482 68.9,107.6 69.4,107.6 69.9,107.6 77.8,107.969 78.4,107.969 77.8,109.482 78.4,109.482 68.9,110.6 69.4,110.6 69.9,110.6 74.8,110.882 75.4,110.882 76,110.882 76.6,110.882 77.2,110.882 77.8,110.882 78.4,110.882 74.8,111.482 75.4,111.482 76,111.482 76.6,111.482 77.2,111.482 77.8,111.482 74.8,112.082 75.4,112.082 76,112.082 76.6,112.082 77.2,112.082 68.9,113.6 69.4,113.6 69.9,113.6
DC_CS: C90.1 C116.1 J10.31 R46.1 TP16.1 | length 79.7
  Top Layer w0.2: R46.1@59.2,37.5 59.3,37.6 C90.1@60.6,37.6 v1(60.6,38.5) ; 108.6,47.1 108.7,47.2 108.7,48.4 v1(110,49.7) 110,50.5 C116.1@109.9,50.6 ; v1(109.7,32.6) 109.757,32.657 113.434,32.657 TP16.1@113.8,33.024
  Mid2 w0.2: v1(109.7,32.6) 109.7,47.2 110.033,47.533 110.033,49.667 v1(110,49.7)
  Bottom Layer w0.2: v1(60.6,38.5) 60.608,38.5 60.867,38.759 63.344,38.759 67.303,34.8 90.166,34.8 92.116,32.85 109.433,32.85 109.683,32.6 v1(109.7,32.6)
DC_VS: C92.1 C115.1 J10.33 R50.1 TP18.1 | length 35.9
  Top Layer w0.2: R50.1@102.675,31.2 102.675,32.575 C92.1@102.7,32.6 C92.1@102.725,32.6 ; C92.1@102.7,32.8 102.925,32.8 103.925,33.8 v1(104.65,33.8) ; J10.33@107.9,45.6 107.9,48.9 v1@108.572,49.572 ; v1(108.594,49.55) 108.594,49.631 108.7,49.737 C115.1@108.7,50.7 ; v1(109.1,33.8) 110.5,33.8 TP18.1@113.9,37.2
  Mid2 w0.2: v1(108.594,49.55) 108.594,43.148 109.05,42.693 109.05,33.85 v1(109.1,33.8)
  Bottom Layer w0.2: v1(104.65,33.8) v1(109.1,33.8) ; v1(108.594,49.55) v1@108.594,49.594
F\A\U\L\T\: C24.2 J11.6 R25.2 R72.1 U5.16 U6.16 | length 213.5
  Top Layer w0.2: v1(61.398,39.352) 61.398,40.533 61.9,41.034 61.9,41.1 61.9,42.5 61.5,42.9 61.5,50.8 61.8,51.1 61.8,51.125 R25.2@62.175,51.5 ; v1(61.75,77.007) 61.807,77.065 61.807,77.403 61.992,77.588 61.992,94.846 62.085,94.939 62.085,95.386 v1(62.142,95.443) ; R25.2@62.188,51.488 62.275,51.4 R25.2@62.3,51.4 ; R25.2@62.2,51.5 R25.2@62.175,51.5 ; v1(63.3,76.95) 63.357,77.007 63.676,77.007 63.769,77.1 71.7,77.1 72.234,77.1 72.609,76.725 75.966,76.725 76.366,77.125 80.125,77.125 81.5,78.5 81.5,82.097 82.375,82.972 U6.16@82.375,84.05 82.375,84.175 U6.16@82.4,84.2 ; v1@63.459,76.791 61.75,75.081 61.75,57.763 62.063,57.449 62.063,54.463 61.5,53.9 61.5,52.175 R25.2@62.175,51.5 ; C24.2@71.925,97.3 71.925,97.275 v1@72.631,96.569 ; v1(80,97.8) 80.919,97.8 81.275,98.156 81.275,101.288 82.175,102.188 U5.16@82.175,103.532 ; R72.1@142,39.2 142,23.052 142.5,22.552 J11.6@142.5,22.5
  Bottom Layer w0.2: v1(61.398,39.352) 63.317,39.352 67.469,35.2 90.331,35.2 92.281,33.25 109.622,33.25 110.801,34.429 115.171,34.429 115.5,34.1 v1(142,34.1) ; v1(61.75,77.007) 61.779,76.979 63.271,76.979 v1(63.3,76.95) ; v1(62.142,95.443) 62.849,95.443 62.999,95.593 71.659,95.593 71.939,95.873 72.151,95.873 v1(72.688,96.41) 73.198,95.9 77.378,95.9 77.85,96.372 77.85,97.05 78.1,97.3 ; 78.15,97.35 79.328,97.35 79.602,97.624 79.743,97.624 79.919,97.8 v1(80,97.8)
FB_TMP: C75.1 C107.2 J10.17 R43.1 | length 143.2
  Top Layer w0.2: v1(58.95,44.778) 58.95,50.85 59.1,51 59.1,54.028 58.55,54.578 58.55,69.7 55.3,72.95 55.3,75.845 58.488,79.034 58.488,91.4 58.163,91.725 57.325,91.725 57,92.05 56.296,92.05 55.3,93.046 55.3,94.102 55.3,94.454 57.681,96.835 58.829,96.835 59.829,97.836 60.285,97.836 60.536,97.585 60.619,97.585 60.702,97.585 60.76,97.643 60.8,97.683 v1(60.8,97.7) ; v1(114.3,43.3) J10.17@114.3,45.6 C107.2@114.3,50.7
  Bottom Layer w0.2: v1(58.95,44.778) 59,44.728 59.05,44.778 62.894,44.778 62.99,44.874 79.226,44.874 81.55,42.55 113.95,42.55 114.3,42.9 v1(114.3,43.3) ; v1(60.8,97.7) 63.342,97.7 63.849,97.193 70.996,97.193 72.17,98.367 73.967,98.367 74.2,98.6 74.725,98.6 75.1,98.975 C75.1@75.1,99 75.202,98.898 R43.1@76.7,98.898
GND: C16.2 C17.2 C19.2 C20.1 C21.2 C22.2 C23.2 C24.1 C27.2 C28.2 C29.1 C30.2 C31.1 C32.2 C38.2 C39.2 C45.1 C46.2 C69.1 C73.1 C75.2 C87.2 C90.2 C92.2 C93.1 C94.2 C95.1 C97.2 C98.1 C102.2 C103.2 C106.2 C107.1 C108.1 C109.1 C110.2 C111.2 C112.2 C113.2 C114.2 C115.2 C116.2 C117.2 C118.2 C119.2 C120.2 C121.2 C122.2 C123.2 C124.2 C125.2 C135.2 C137.2 C138.1 D4.2 D5.2 J6.1 J8.1 J9.2 J9.3 J10.7 J10.10 J10.13 J10.16 J10.19 J10.22 J10.29 J10.35 J10.38 J10.46 J10.47 J10.65 J10.83 J10.97 J10.111 J11.1 NT1.1 R17.1 R22.2 R23.2 R24.1 R28.1 R33.2 R34.2 R35.1 R40.1 R42.1 R52.2 R55.2 R59.1 R60.1 R61.1 R100.1 R102.1 S1C1.2 S1C2.2 S1C6.2 S1C8.2 S1C13.1 S1C14.2 S1C15.2 S1C86.2 S1R5.1 S1R7.1 S1U1.3 S1U2.9 S1U4.4 S1U4.5 S1U4.6 S1U4.7 S1U4.8 S2C1.2 S2C2.2 S2C6.2 S2C8.2 S2C13.1 S2C14.2 S2C15.2 S2C86.2 S2R5.1 S2R7.1 S2U1.3 S2U2.9 S2U4.4 S2U4.5 S2U4.6 S2U4.7 S2U4.8 TP7.1 TP11.1 TP25.1 U5.15 U6.15 U7.3 U8.3 U9.2 U10.2 U11.4 U12.1 U12.9 U13.2 U14.3 U15.4 U15.5 U16.2 | length 182.1
  Top Layer w0.2: v1(60,34.1) U10.2@60.66,34.1 ; v1(60.6,35.3) C87.2@60.6,36.1 C87.2@60.625,36.1 ; C90.2@62.2,37.6 v1(63.2,37.6) ; v1(63.8,32.1) C28.2@63.8,33 ; C122.2@69.3,52.3 v1(69.3,53.1) ; C24.1@71.925,98.9 72.1,99.075 v1(72.1,99.7) ; C123.2@72.1,52.3 v1(72.1,53.1) ; v1(73.4,96.617) 73.4,97.382 73.65,97.632 C21.2@73.65,98.782 ; v1(73.483,48.024) 73.492,48.016 73.492,45.608 J10.111@73.5,45.6 ; C124.2@74.9,52.3 v1(74.9,53.1) ; C23.2@76.4,98.782 76.4,97.432 R24.1@76.45,97.382 76.455,97.377 v1(76.455,96.555) ; C125.2@77.7,52.3 v1(77.7,53.1) ; C32.2@77.975,79.3 77.975,78.125 R35.1@78.2,77.9 v1(79,77.9) ; v1(79.083,48.024) 79.092,48.016 79.092,45.608 J10.97@79.1,45.6 ; C29.1@80.5,81.1 C29.1@80.7,80.9 81.075,81.275 81.075,82.484 81.875,83.284 U6.15@81.875,84.05 ; C20.1@80.5,100.382 80.875,100.757 80.875,101.765 81.675,102.565 U5.15@81.675,103.532 ; C120.2@80.7,52.3 v1(80.7,53.1) ; v1(82.7,97.8) 82.7,98.382 82.918,98.6 R22.2@83.057,98.6 ; R22.2@82.8,98.8 84.282,98.8 R23.2@84.3,98.782 ; R33.2@83.1,79.325 R33.2@83.1,79.3 R34.2@84.5,79.3 v1(85.267,79.3) ; C110.2@83.5,52.3 v1(83.5,53.1) ; R59.1@83.9,71.1 83.9,71.075 84.575,70.4 v1(84.6,70.4) ; R23.2@84.143,98.6 R23.2@84.3,98.6 ; v1(84.683,48.024) 84.692,48.016 84.692,45.608 J10.83@84.7,45.6 ; v1@85.275,79.275 v1@85.3,79.3 ; C111.2@86.3,52.3 v1(86.3,53.1) ; R100.1@86.5,60 v1(87.3,60) ; R40.1@86.591,72.854 86.6,72.845 v1(86.6,71.723) ; R40.1@86.623,72.823 86.655,72.855 U7.3@86.655,74.825 ; C121.2@89.1,52.3 v1(89.1,53.1) ; C119.2@90.5,52.3 v1(90.5,53.1) ; v1(91.883,48.024) 91.892,48.016 91.892,45.608 J10.65@91.9,45.6 ; C16.2@92.7,57 92.7,57.777 v1(93.123,58.2) ; C117.2@93.3,52.3 v1(93.3,53.1) ; C106.2@96.1,52.3 v1(96.1,53.1) ; C93.1@98.1,25.6 R52.2@99.5,25.6 99.5,25.625 100.218,26.343 100.543,26.343 v1(100.6,26.4) 100.6,27.325 100.9,27.625 U11.4@101.875,27.625 ; C118.2@98.9,52.3 v1(98.9,53.1) ; v1(99.45,31.85) 100.325,31.85 101.075,32.6 C92.2@101.1,32.6 ; v1(102.283,48.024) 102.292,48.016 102.292,45.608 J10.47@102.3,45.6 ; J10.46@103.1,42.2 103.108,42.192 103.108,39.784 v1(103.117,39.776) ; v1(104.7,30.2) 104.7,31.175 C31.1@104.725,31.2 ; J10.38@106.3,42.2 106.308,42.192 106.308,39.784 v1(106.317,39.776) ; v1(107.083,48.024) 107.092,48.016 107.092,45.608 J10.35@107.1,45.6 ; C113.2@107.3,52.3 v1(107.3,53.1) ; C39.2@107.8,35.9 107.8,35.925 108.475,36.6 v1(108.5,36.6) ; C115.2@108.7,52.3 v1(108.7,53.1) ; v1(109.483,48.024) 109.492,48.016 109.492,45.608 J10.29@109.5,45.6 ; C116.2@110.1,52.3 v1(110.1,53.1) ; R55.2@110.3,27.1 C95.1@110.3,28.5 ; C94.2@110.3,29.9 C95.1@110.3,28.5 ; v1(110.321,36.6) 110.378,36.543 110.532,36.543 111.05,36.025 C112.2@111.05,36 ; v1(111.134,28.495) 111.13,28.5 C95.1@110.3,28.5 ; C38.2@111.5,52.3 v1(111.5,53.1) ; J10.22@112.7,42.2 J10.22@112.708,42.192 ; C114.2@112.9,52.3 v1(112.9,53.1) ; v1(113.5,44.7) J10.19@113.5,45.6 ; C107.1@114.3,52.3 v1(114.3,53.1) ; J10.16@115.1,42.2 v1(115.1,43.399) ; C108.1@115.7,52.3 v1(115.7,53.1) ; v1(115.883,48.024) 115.892,48.016 115.892,45.608 J10.13@115.9,45.6 ; C109.1@117.1,52.3 v1(117.1,53.1) ; J10.10@117.5,42.2 117.508,42.192 117.508,39.784 v1(117.517,39.776) ; v1(118.283,48.024) 118.292,48.016 118.292,45.608 J10.7@118.3,45.6 ; R61.1@128.6,28 129.473,28 v1(129.488,27.984) ; U13.2@128.6,30.7 v1(129.6,30.7) ; S1R5.1@168.7,40.6 S1C8.2@168.7,44.79 ; S1C8.2@168.7,44.865 v1(168.7,45.969) S1U2.9@168.7,47.518 ; S1C86.2@177.026,41.201 S1C2.2@178.371,41.201 ; v1(178.4,40.2) 178.4,41.172 S1C2.2@178.371,41.201 ; S1C1.2@179.753,41.201 S1C2.2@178.371,41.201 ; v1@181.9,49.6 181.994,49.694 S1U1.3@181.994,51.918 ; v1(204.528,46.354) 204.528,41.231 S2R5.1@204.603,41.156 ; v1@204.528,46.523 S2U2.9@204.528,48.172 ; S2C86.2@212.854,41.156 S2C2.2@214.198,41.156 ; v1(214.2,40.2) 214.2,41.154 S2C2.2@214.198,41.156 ; S2C1.2@215.581,41.156 S2C2.2@214.198,41.156 ; v1@217.2,47.2 217.202,47.198 217.298,47.198 217.821,47.721 S2U1.3@217.821,51.872 ; v1(230.7,42.7) 230.727,42.727 230.727,43.898 U8.3@230.755,43.925 ; v1(231.4,38) C17.2@231.4,39 ; v1(236.1,38.2) 236.1,38.275 236.8,38.975 R42.1@236.8,39 ; v1(240.5,41.5) 240.525,41.5 240.775,41.25 C22.2@241.55,41.25 ; C69.1@246.2,39.1 246.225,39.1 247.25,40.125 247.425,40.125 C135.2@247.8,40.5 248.7,40.5 v1(249.1,40.1) 249.35,40.1 249.925,39.525 U15.5@249.925,39.075 ; C137.2@247.8,43.3 v1(248.8,43.3) 249.81,43.3 249.925,43.415 U15.4@249.925,43.525 ; v1(255.4,44.6) U16.2@256.275,44.6 ; v1(269.2,67.2) 269.255,67.255 U14.3@269.255,68.525 ; v1(271.7,61.8) C97.2@271.7,62.9 ; v1(274.5,62) C46.2@274.5,62.9 ; R102.1@277.6,62.9 v1(278.4,62.9)
  Top Layer w0.5: v1(63.7,73.5) C102.2@64.6,73.5 ; R28.1@75.1,77.9 C30.2@75.1,79.3 ; U12.1@78.665,61.254 78.665,63.665 U12.9@78.7,63.7 ; C138.1@80.875,59 81.498,59 v1(81.523,59.025) ; v1(81.498,56.875) C98.1@82.675,56.875 ; C98.1@82.75,56.8 82.75,56.325 83.05,56.025 83.681,56.025 v1(83.781,55.925) ; R100.1@86.5,60 R60.1@86.5,61.4 ; C45.1@128.6,35.2 v1(128.6,36) ; C103.2@131.2,35.3 v1(131.2,36) ; v1(150.3,34.4) D5.2@150.3,35.175 ; v1(152.1,34.4) D4.2@152.1,35.175 ; C73.1@277.53,59.5 v1@278.613,59.5
  Top Layer w0.6: C98.1@82.675,56.875 C98.1@82.75,56.8
  Top Layer w0.8: v1@278.613,59.5 v1(278.64,59.528)
  Mid1 w0.2: J6.1@128.67,22.3 128.67,23.77 ; J11.1@155.16,22.2 155.16,23.74 ; v1(182,49.6) 182,48.274 182.024,48.25 ; v1(236.1,38.2) 236.1,39.18 236.36,39.44 ; 240.781,45.465 240.841,45.525
  Bottom Layer w0.2: v1(72.1,99.7) 74.2,99.7 74.7,100.2 74.725,100.2 75.1,100.575 C75.2@75.1,100.6 76.373,100.6 76.675,100.298 C27.2@76.7,100.298 C27.2@76.725,100.298 ; v2(80.675,101.557) 80.675,100.858 81.755,99.778 82.125,99.778 U9.2@82.225,99.678 ; v1(84.683,48.024) v1@84.7,48.024
  Bottom Layer w0.5: v1(62.6,93.769) v1@62.728,93.769
  Bottom Layer w0.8: v1@62.728,93.664 63.827,93.664 64.256,94.093 74.343,94.093 74.55,94.3 NT1.1@78.543,94.3
  other v1: 93.423,21.036 96.423,21.036 99.423,21.036 102.423,21.036 111.423,21.036 114.423,21.036 117.423,21.036 120.423,21.036 138.423,21.036 141.423,21.036 153.423,21.036 156.423,21.036 159.423,21.036 162.423,21.036 165.423,21.036 168.423,21.036 171.423,21.036 174.423,21.036 177.423,21.036 180.423,21.036 183.423,21.036 186.423,21.036 189.423,21.036 192.423,21.036 195.423,21.036 198.423,21.036 201.423,21.036 204.423,21.036 207.423,21.036 210.423,21.036 213.423,21.036 216.423,21.036 219.423,21.036 222.423,21.036 225.423,21.036 91.923,24.036 97.923,24.036 124.923,24.036 127.923,24.036 130.923,24.036 142.923,24.036 151.923,24.036 154.923,24.036 157.923,24.036 160.923,24.036 163.923,24.036 166.923,24.036 169.923,24.036 172.923,24.036 175.923,24.036 178.923,24.036 181.923,24.036 184.923,24.036 187.923,24.036 190.923,24.036 193.923,24.036 196.923,24.036 199.923,24.036 202.923,24.036 205.923,24.036 208.923,24.036 211.923,24.036 214.923,24.036 217.923,24.036 220.923,24.036 223.923,24.036 226.923,24.036 111.423,27.036 114.423,27.036 117.423,27.036 123.423,27.036 132.423,27.036 144.423,27.036 150.423,27.036 153.423,27.036 156.423,27.036 159.423,27.036 162.423,27.036 165.423,27.036 168.423,27.036 171.423,27.036 174.423,27.036 177.423,27.036 180.423,27.036 183.423,27.036 186.423,27.036 189.423,27.036 192.423,27.036 195.423,27.036 198.423,27.036 201.423,27.036 204.423,27.036 207.423,27.036 210.423,27.036 213.423,27.036 216.423,27.036 219.423,27.036 222.423,27.036 225.423,27.036 228.423,27.036 91.923,30.036 112.923,30.036 118.923,30.036 121.923,30.036 124.923,30.036 133.923,30.036 142.923,30.036 226.923,30.036 229.923,30.036 232.923,30.036 234.423,33.036 105.423,39.036 120.423,39.036 123.423,39.036 126.423,39.036 213.423,39.036 216.423,39.036 219.423,39.036 121.923,42.036 124.923,42.036 130.923,42.036 151.923,42.036 190.923,42.036 193.923,42.036 196.923,42.036 199.923,42.036 202.923,42.036 226.923,42.036 229.923,42.036 259.923,42.036 112.7,43.583 96.423,45.036 240.423,45.036 258.423,45.036 217.2,47.1 157.923,48.036 160.923,48.036 163.923,48.036 166.923,48.036 256.923,48.036 259.923,48.036 265.923,48.036 138.423,51.036 141.423,51.036 261.423,51.036 264.423,51.036 88.923,54.036 262.923,54.036 265.923,54.036 271.923,54.036 120.423,57.036 123.423,57.036 126.423,57.036 129.423,57.036 132.423,57.036 135.423,57.036 138.423,57.036 267.423,57.036 273.423,57.036 277.014,58.014 94.923,60.036 97.923,60.036 100.923,60.036 103.923,60.036 106.923,60.036 109.923,60.036 112.923,60.036 115.923,60.036 118.923,60.036 121.923,60.036 124.923,60.036 127.923,60.036 130.923,60.036 133.923,60.036 136.923,60.036 93.423,63.036 96.423,63.036 99.423,63.036 102.423,63.036 88.923,66.036 91.923,66.036 94.923,66.036 97.923,66.036 271.923,66.036 274.923,66.036 277.923,66.036 87.423,69.036 90.423,69.036 93.423,69.036 96.423,69.036 96.423,75.036 88.923,78.036 91.923,78.036 94.923,78.036
  other v2: 225.215,40.809 189.387,40.854 225.228,41.822 189.4,41.867 189.413,42.881 225.253,43.848 225.266,44.861 225.279,45.874 189.451,45.92 75.1,78.6 80.875,82.181 59.8,98.7 64.1,98.7 62.4,98.8 63.255,98.8
  other v3: 79.27,63.479 80.57,63.479 81.87,63.479 79.27,64.779 80.57,64.779 81.87,64.779
  other v5: 63.254,93.664
GPIO_DEBUG1: J6.2 J10.78 | length 55.5
  Top Layer w0.2: J10.78@87.1,41.4 87.1,31.331 87.222,31.209 87.222,27.428 v1(87.642,27.008)
  Bottom Layer w0.2: v1(87.642,27.008) 87.723,27.008 87.873,26.858 99.692,26.858 100.184,27.35 101.388,27.35 102.113,26.625 103.317,26.625 104.042,25.9 110.688,25.9 111.163,25.425 115.108,25.425 115.908,24.625 117.882,24.625 118.219,24.288 119.269,24.288 119.731,23.825 121.682,23.825 122.082,23.425 124.056,23.425 125.005,22.476 125.954,22.476 J6.2@126.13,22.3
GPIO_DEBUG2: J6.3 J10.80 | length 54.9
  Top Layer w0.2: J10.80@86.3,42.2 86.3,31.566 86.822,31.044 v1(86.822,26.458)
  Bottom Layer w0.2: v1(86.822,26.458) 86.864,26.5 86.906,26.458 99.858,26.458 100.35,26.95 100.9,26.95 101.625,26.225 103.152,26.225 103.877,25.5 110.522,25.5 110.997,25.025 114.942,25.025 115.742,24.225 117.716,24.225 118.054,23.888 119.079,23.888 119.542,23.425 121.516,23.425 122.465,22.476 123.414,22.476 J6.3@123.59,22.3
GPIO_DEBUG3: J6.4 J10.82 | length 52.3
  Top Layer w0.2: J10.82@85.5,41.6 85.5,31.8 86.272,31.028 v1(86.272,25.9)
  Bottom Layer w0.2: v1(86.272,25.9) 86.3,25.9 86.35,25.85 100.95,25.85 101.25,25.55 103.261,25.55 103.711,25.1 110.356,25.1 110.831,24.625 114.776,24.625 115.001,24.401 115.576,23.825 117.551,23.825 117.888,23.488 118.913,23.488 119.925,22.476 120.874,22.476 J6.4@121.05,22.3
GPIO_WIRELESS1: J10.96
GPIO_WIRELESS2: J10.94
L_EXT: F1.2 J2.1 TP3.1 | length 19.5
  Mid4 w0.5: F1.2@276.6,38.2 276.73,38.33 286.23,38.33 TP3.1@286.3,38.4
  Mid4 w4: J2.1@273,30 273,34.446 275.375,36.821 275.375,36.935 F1.2@276.62,38.18
L_M: C129.2 F1.1 L9.3 R38.2 R96.1 R99.2 R112.1 | length 109
  Top Layer w0.2: R38.2@255.092,82.18 255.2,82.072 255.2,80.695 255.4,80.495 R112.1@255.4,79.6 ; R38.2@255.475,82.7 255.575,82.8 255.575,87.225 C129.2@257.15,88.8